# Altium PCB Temctrl.PcbDoc (part 2 of 2)
Units mm, origin at the board's own origin, x right, y up, seen from the top; angles counter-clockwise.
Board outline 209.42 x 71.25 mm, 2 copper layers (Top Layer, Bottom Layer); 243 components, 190 nets, 729 pads, 123 vias.
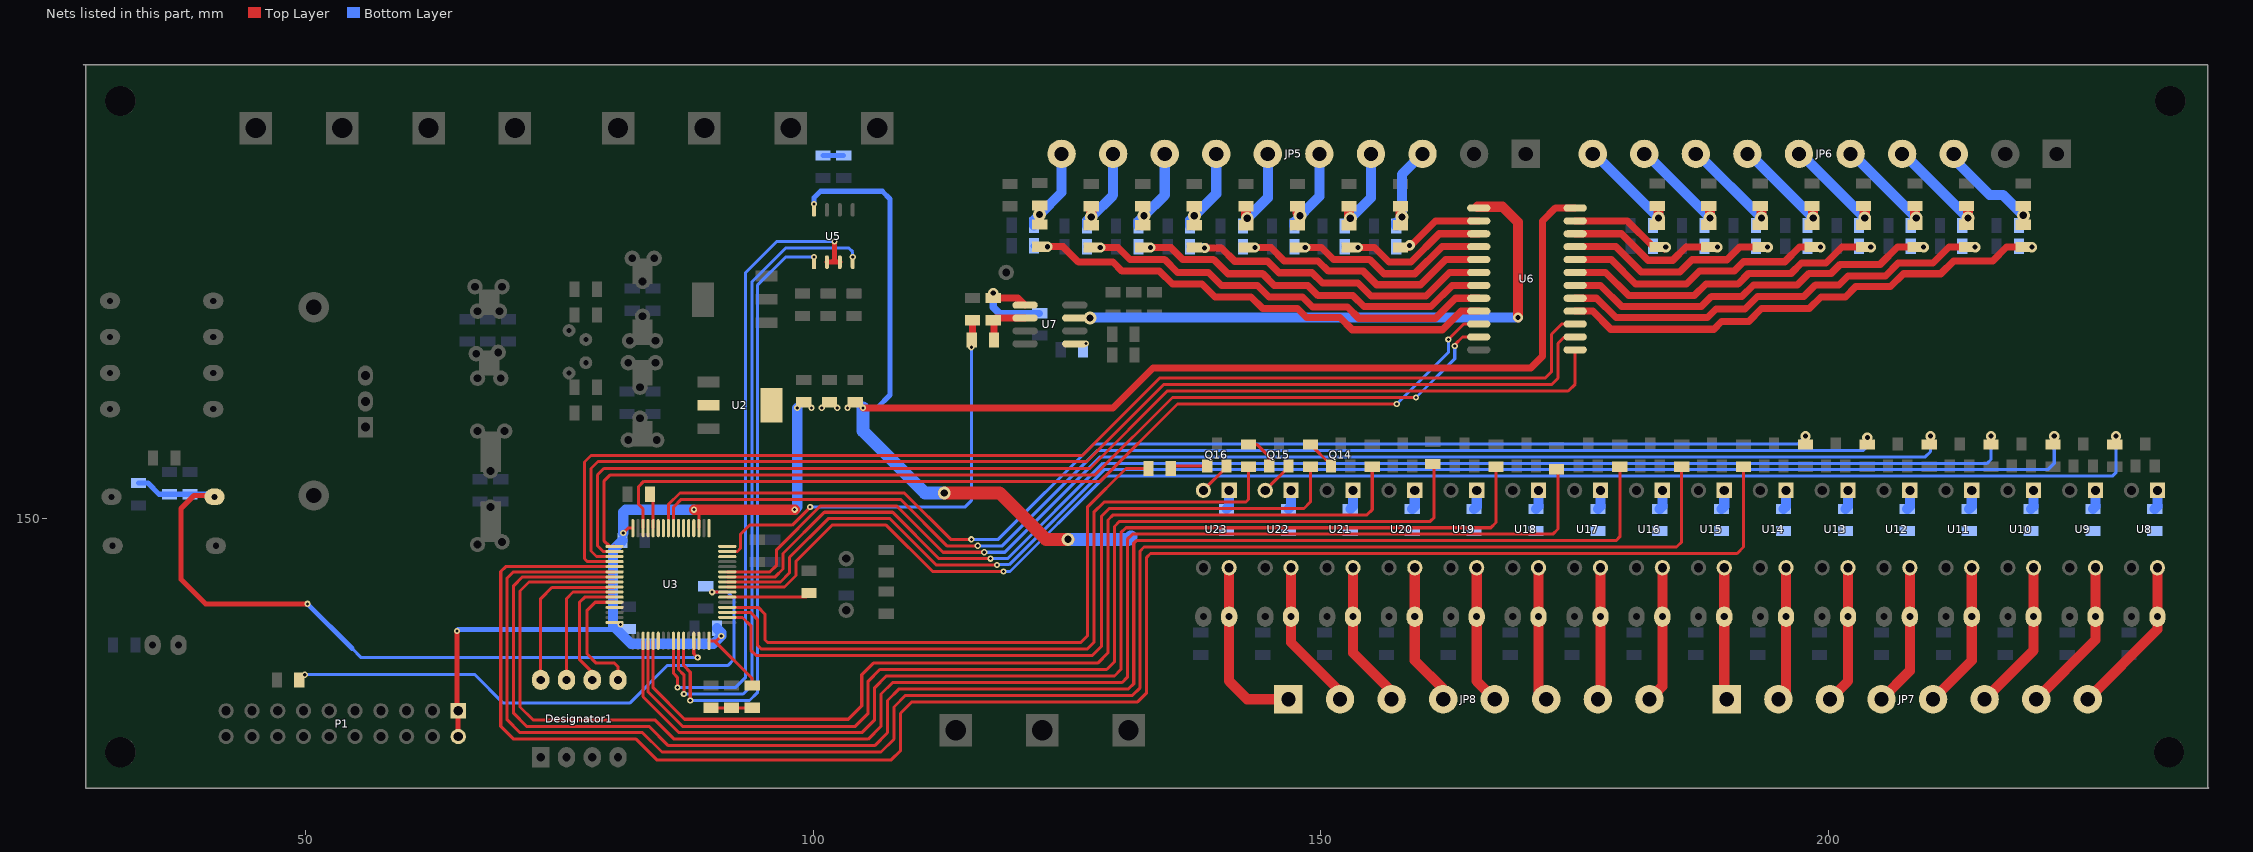
[diagram p2: the nets of this part, all layers, seen from the top]

## Via types
v1: diameter 0.61, hole 0.305, Top Layer to Bottom Layer, 72 vias
v2: diameter 1.27, hole 0.711, Top Layer to Bottom Layer, 20 vias
v3: diameter 1.016, hole 0.508, Top Layer to Bottom Layer, 17 vias
v4: diameter 1, hole 0.5, Top Layer to Bottom Layer, 7 vias
v5: diameter 1.25, hole 0.5, Top Layer to Bottom Layer, 6 vias
v6: diameter 0.7, hole 0.305, Top Layer to Bottom Layer, 1 vias

## Nets (pads, with @x,y where several pads share a name; then routed paths per layer and width w, separated by ;. In a path a pad name is that pad's centre, name@x,y a point inside that pad or via, vN(x,y) a via of type N, cw(c..) or ccw(c..) an arc to the next point about the centre after c; other vN are vias at no path point) (continued)
NetQ14_2: Q14.2 R100.2 | length 3
  Top Layer w0.3: R100.2@148.971,157.31 151.002,155.279 Q14.2@151.002,155.19
NetQ15_1: Q15.1 U22.2 | length 3.4
  Top Layer w0.3: U22.2@144.526,152.781 146.811,155.066 Q15.1@146.811,155.19
NetQ15_2: Q15.2 R101.2 | length 3.4
  Top Layer w0.3: R101.2@142.875,157.31 143.68,157.31 144.906,156.084 Q15.2@144.906,155.19
NetQ16_1: Q16.1 U23.2 | length 3.4
  Top Layer w0.3: U23.2@138.43,152.781 140.715,155.066 Q16.1@140.715,155.19
NetQ16_2: Q16.2 R102.2 | length 3.7
  Top Layer w0.3: R102.2@135.212,154.94 135.462,155.19 Q16.2@138.81,155.19
NetR6_2: R6.2 U3.6 | length 8.2
  Top Layer w0.3: U3.6@91.529,142.26 99.291,142.26 R6.2@99.568,142.537
NetR8_1: R8.1 R9.2 R10.2 | length 4.1
  Top Layer w0.3: R9.2@89.916,131.361 R10.2@91.948,131.361 R8.1@93.98,131.361
NetR13_1: R13.1 R14.1 | length 2
  Bottom Layer w0.5: R14.1@100.965,185.758 R13.1@102.997,185.758
NetR32_1: R32.1 U7.1
  other v1: 126.873,167.259
NetR44_1: R44.1 R46.1 U7.6 | length 5.1
  Top Layer w0.7: R44.1@117.813,167.597 117.813,169.629 117.94,169.756 U7.6@120.867,169.756
NetR45_2: R45.2 R46.2 U7.5 | length 9.7
  Top Layer w0.7: R46.2@117.729,171.745 120.148,171.745 U7.5@120.867,171.026
  Bottom Layer w0.7: v3(117.729,172.212) 117.729,170.815 118.323,170.221 R45.2@122.301,170.221
NetR59_2: R59.2 U8.1 | length 1.9
  Bottom Layer w1: R59.2@232.156,150.96 232.41,151.214 U8.1@232.41,152.781
NetR60_2: R60.2 U9.1 | length 1.9
  Bottom Layer w1: R60.2@226.06,150.96 226.314,151.214 U9.1@226.314,152.781
NetR61_2: R61.2 U10.1 | length 1.9
  Bottom Layer w1: R61.2@219.964,150.96 220.218,151.214 U10.1@220.218,152.781
NetR62_2: R62.2 U11.1 | length 1.9
  Bottom Layer w1: R62.2@213.868,150.96 214.122,151.214 U11.1@214.122,152.781
NetR71_2: R71.2 U12.1 | length 1.9
  Bottom Layer w1: R71.2@207.772,150.96 208.026,151.214 U12.1@208.026,152.781
NetR72_2: R72.2 U13.1 | length 1.9
  Bottom Layer w1: R72.2@201.676,150.96 201.93,151.214 U13.1@201.93,152.781
NetR73_2: R73.2 U14.1 | length 1.9
  Bottom Layer w1: R73.2@195.58,150.96 195.834,151.214 U14.1@195.834,152.781
NetR74_2: R74.2 U15.1 | length 1.9
  Bottom Layer w1: R74.2@189.484,150.96 189.738,151.214 U15.1@189.738,152.781
NetR83_2: R83.2 U16.1 | length 1.9
  Bottom Layer w1: R83.2@183.388,150.96 183.642,151.214 U16.1@183.642,152.781
NetR84_2: R84.2 U17.1 | length 1.9
  Bottom Layer w1: R84.2@177.292,150.96 177.546,151.214 U17.1@177.546,152.781
NetR85_2: R85.2 U18.1 | length 1.9
  Bottom Layer w1: R85.2@171.196,150.96 171.45,151.214 U18.1@171.45,152.781
NetR86_2: R86.2 U19.1 | length 1.9
  Bottom Layer w1: R86.2@165.1,150.96 165.354,151.214 U19.1@165.354,152.781
NetR95_2: R95.2 U20.1 | length 1.9
  Bottom Layer w1: R95.2@159.004,150.96 159.258,151.214 U20.1@159.258,152.781
NetR96_2: R96.2 U21.1 | length 1.9
  Bottom Layer w1: R96.2@152.908,150.96 153.162,151.214 U21.1@153.162,152.781
NetR97_2: R97.2 U22.1 | length 1.9
  Bottom Layer w1: R97.2@146.812,150.96 147.066,151.214 U22.1@147.066,152.781
NetR98_2: R98.2 U23.1 | length 1.9
  Bottom Layer w1: R98.2@140.716,150.96 140.97,151.214 U23.1@140.97,152.781
OUT0: D8.2 JP7.8 U8.4 | length 15.8
  Top Layer w1: JP7.8@225.552,132.207 232.41,139.065 D8.2@232.41,140.335 U8.4@232.41,145.161
OUT1: D9.2 JP7.7 U9.4 | length 15.4
  Top Layer w1: JP7.7@220.472,132.207 226.314,138.049 D9.2@226.314,140.335 U9.4@226.314,145.161
OUT2: D10.2 JP7.6 U10.4 | length 15
  Top Layer w1: JP7.6@215.392,132.207 220.218,137.033 D10.2@220.218,140.335 U10.4@220.218,145.161
OUT3: D11.2 JP7.5 U11.4 | length 14.5
  Top Layer w1: JP7.5@210.312,132.207 214.122,136.017 D11.2@214.122,140.335 U11.4@214.122,145.161
OUT4: D12.2 JP7.4 U12.4 | length 14.1
  Top Layer w1: JP7.4@205.232,132.207 208.026,135.001 D12.2@208.026,140.335 U12.4@208.026,145.161
OUT5: D13.2 JP7.3 U13.4 | length 13.7
  Top Layer w1: JP7.3@200.152,132.207 201.93,133.985 D13.2@201.93,140.335 U13.4@201.93,145.161
OUT6: D14.2 JP7.2 U14.4 | length 13.3
  Top Layer w1: JP7.2@195.072,132.207 195.834,132.969 D14.2@195.834,140.335 U14.4@195.834,145.161
OUT7: D15.2 JP7.1 U15.4 | length 13.1
  Top Layer w1: U15.4@189.738,145.161 D15.2@189.738,140.335 189.738,132.461 JP7.1@189.992,132.207
OUT8: D16.2 JP8.8 U16.4 | length 13.5
  Top Layer w1: JP8.8@182.372,132.207 183.642,133.477 D16.2@183.642,140.335 U16.4@183.642,145.161
OUT9: D17.2 JP8.7 U17.4 | length 13.1
  Top Layer w1: JP8.7@177.292,132.207 177.546,132.461 D17.2@177.546,140.335 U17.4@177.546,145.161
OUT10: D18.2 JP8.6 U18.4 | length 13.3
  Top Layer w1: U18.4@171.45,145.161 D18.2@171.45,140.335 171.45,132.969 JP8.6@172.212,132.207
OUT11: D19.2 JP8.5 U19.4 | length 13.7
  Top Layer w1: U19.4@165.354,145.161 D19.2@165.354,140.335 165.354,133.985 JP8.5@167.132,132.207
OUT12: D20.2 JP8.4 U20.4 | length 14.1
  Top Layer w1: U20.4@159.258,145.161 D20.2@159.258,140.335 159.258,136.017 162.052,133.223 JP8.4@162.052,132.207
OUT13: D21.2 JP8.3 U21.4 | length 14.5
  Top Layer w1: U21.4@153.162,145.161 D21.2@153.162,140.335 153.162,136.779 156.972,132.969 JP8.3@156.972,132.207
OUT14: D22.2 JP8.2 U22.4 | length 15
  Top Layer w1: U22.4@147.066,145.161 D22.2@147.066,140.335 147.066,137.795 151.892,132.969 JP8.2@151.892,132.207
OUT15: D23.2 JP8.1 U23.4 | length 17.8
  Top Layer w1: U23.4@140.97,145.161 D23.2@140.97,140.335 140.97,133.985 142.748,132.207 JP8.1@146.812,132.207
PA0: U3.14
PA1: C62.2 R44.2 U3.15 | length 47.1
  Top Layer w0.3: U3.15@91.529,146.76 92.531,146.76 92.837,147.066 92.837,148.463 93.726,149.352 97.917,149.352 v1(99.695,151.13)
  Top Layer w0.7: R44.2@115.613,167.597 115.697,167.681 C62.2@115.697,169.545
  Bottom Layer w0.3: v1(99.695,151.13) 114.935,151.13 115.57,151.765 115.57,155.702 115.57,162.814 ; 115.57,165.862 115.57,162.814 ; v1(115.57,166.878) 115.57,162.814
PA2: U3.16
PA3: U3.17
PA4: U3.20
PA5: U3.21
PA6: U3.22
PA7: U3.23
PA8: Designator1.8 U3.41 | length 19.6
  Top Layer w0.3: Designator1.8@73.152,134.112 73.152,139.573 ; 73.152,135.763 73.152,139.573 ; U3.41@80.429,143.26 80.381,143.212 74.251,143.212 73.152,142.113 73.152,139.573
PA9: Designator1.7 U3.42 | length 13.9
  Top Layer w0.3: Designator1.7@75.692,134.112 75.692,136.652 ; 75.692,135.763 75.692,136.652 ; U3.42@80.429,142.76 76.339,142.76 75.692,142.113 75.692,136.652
PA10: Designator1.6 U3.43 | length 11.8
  Top Layer w0.3: Designator1.6@78.232,134.112 78.232,134.874 76.962,136.144 76.962,141.732 77.49,142.26 U3.43@80.429,142.26
PA11: Designator1.5 U3.44 | length 12.2
  Top Layer w0.3: U3.44@80.429,141.76 78.514,141.76 77.724,140.97 77.724,136.652 78.613,135.763 80.423,135.763 80.772,135.414 Designator1.5@80.772,134.112
PA12: U3.45
PB0: U3.26
PB1: U3.27
PB2: R1.2 U3.28 | length 3.5
  Top Layer w0.3: R1.2@83.904,152.4 84.229,152.075 U3.28@84.229,149.06
PB5: U3.57 U5.2 U5.3 | length 65.2
  Top Layer w0.3: U3.57@86.229,137.96 86.229,134.751 86.614,134.366 v1(86.614,133.35)
  Top Layer w0.508: U5.2@101.346,175.26 101.854,175.26 ; v1(102.108,177.292) 102.108,175.514 101.854,175.26 ; U5.3@102.616,175.26 101.854,175.26
  Bottom Layer w0.3: v1(86.614,133.35) 92.329,133.35 93.345,134.366 93.345,174.244 96.393,177.292 v1(102.108,177.292)
PB8: C9.1 D5.2 R3.1 R5.1 U3.61 | length 74.8
  Top Layer w0.3: U3.61@88.229,137.96 88.229,136.688 v1(88.615,136.302)
  Top Layer w0.5: D5.2@41.021,152.146 40.894,152.273 38.989,152.273 37.719,151.003 37.719,144.018 40.132,141.605 v1(50.165,141.605)
  Bottom Layer w0.3: 54.555,137.215 55.468,136.302 v1(88.615,136.302)
  Bottom Layer w0.5: R3.1@33.528,153.5 34.46,153.5 35.56,152.4 C9.1@36.576,152.4 R5.1@38.608,152.4 40.767,152.4 D5.2@41.021,152.146 ; v1(50.165,141.605) 54.555,137.215
PB9: U3.62
PB10: U3.29
PB11: U3.30 U6.10 | length 94.4
  Top Layer w0.3: U3.30@83.229,149.06 83.229,150.959 82.804,151.384 82.804,153.162 83.312,153.67 128.27,153.67 135.89,161.29 v1(157.48,161.29) ; v1(162.56,167.64) 164.084,169.164 U6.10@165.557,169.164
  Bottom Layer w0.3: v1(157.48,161.29) 162.56,166.37 v1(162.56,167.64)
PB12: U3.33 U6.11 | length 100.1
  Top Layer w0.3: U3.33@80.369,147.32 U3.33@80.429,147.26 79.943,147.26 79.375,147.828 79.375,153.67 80.01,154.305 85.344,154.305 127.762,154.305 135.382,161.925 v1(159.385,161.925) ; v1(163.195,167.005) 163.195,167.132 163.957,167.894 U6.11@165.557,167.894
  Bottom Layer w0.3: v1(159.385,161.925) 163.195,165.735 v1(163.195,167.005)
PB13: U3.34 U6.13 | length 112.3
  Top Layer w0.3: U3.34@80.429,146.76 79.3,146.76 78.74,147.32 78.74,154.305 79.375,154.94 124.482,154.94 127.254,154.94 134.874,162.56 174.371,162.56 175.057,163.246 U6.13@175.057,166.624
PB14: U3.35 U6.14 | length 115
  Top Layer w0.3: U3.35@80.429,146.26 78.657,146.26 78.105,146.812 78.105,154.94 78.796,155.631 123.919,155.631 126.929,155.631 134.493,163.195 172.72,163.195 173.355,163.83 173.355,167.259 173.99,167.894 U6.14@175.057,167.894
PB15: U3.36 U6.15 | length 118
  Top Layer w0.3: U3.36@80.429,145.76 77.76,145.76 77.47,146.05 77.47,155.575 78.109,156.214 126.496,156.214 134.112,163.83 172.085,163.83 172.72,164.465 172.72,168.148 173.736,169.164 U6.15@175.057,169.164
PC0: R63.1 U3.8 | length 150.4
  Top Layer w0.3: U3.8@91.529,143.26 97.159,143.26 98.298,144.399 98.298,145.796 101.854,149.352 107.188,149.352 111.76,144.78 112.395,144.78 v1(118.745,144.78) ; R63.1@228.219,157.31 228.346,157.437 v4@228.346,157.861
  Bottom Layer w0.3: v1(118.745,144.78) 119.38,144.78 128.778,154.178 227.965,154.178 228.346,154.559 v4(228.346,158.115) v4@228.346,158.242
PC1: R64.1 U3.9 | length 142.9
  Top Layer w0.3: U3.9@91.529,143.76 96.77,143.76 97.663,144.653 97.663,146.177 101.473,149.987 107.569,149.987 112.141,145.415 v1(118.11,145.415)
  Bottom Layer w0.3: v1(118.11,145.415) 118.15,145.455 119.293,145.455 128.651,154.813 221.615,154.813 222.25,155.448 v4(222.25,158.115)
PC2: R65.1 U3.10 | length 137.1
  Top Layer w0.3: U3.10@91.529,144.26 96.254,144.26 97.028,145.034 97.028,146.558 101.092,150.622 107.823,150.622 112.395,146.05 v1(117.475,146.05) ; R65.1@216.027,157.31 v4(216.027,158.115)
  Bottom Layer w0.3: v1(117.475,146.05) 119.126,146.05 128.524,155.448 215.646,155.448 216.027,155.829 v4(216.027,158.115)
PC3: R66.1 U3.11 | length 131.8
  Top Layer w0.3: U3.11@91.529,144.76 95.738,144.76 96.393,145.415 96.393,146.939 100.711,151.257 108.204,151.257 112.776,146.685 v1(116.84,146.685) ; R66.1@209.931,157.31 210.058,157.437 v4(210.058,158.115)
  Bottom Layer w0.3: v1(116.84,146.685) 118.872,146.685 128.27,156.083 209.55,156.083 210.058,156.591 ; v4@210.058,157.861 210.058,156.591 ; v4(210.058,158.115) 210.058,156.591
PC4: R75.1 U3.24 | length 127.5
  Top Layer w0.3: U3.24@86.229,149.06 86.229,151.126 86.995,151.892 108.585,151.892 113.157,147.32 v1(116.205,147.32) ; R75.1@203.835,157.31 v4(203.835,157.988)
  Bottom Layer w0.3: v1(116.205,147.32) 118.618,147.32 128.016,156.718 203.454,156.718 203.835,157.099 v4(203.835,157.988)
PC5: R76.1 U3.25 | length 121.7
  Top Layer w0.3: U3.25@85.729,149.06 85.729,151.388 86.868,152.527 108.966,152.527 113.538,147.955 v1(115.57,147.955) ; R76.1@197.739,157.31 v4(197.739,158.115)
  Bottom Layer w0.3: v1(115.57,147.955) 118.237,147.955 127.635,157.353 196.977,157.353 v4(197.739,158.115)
PC6: R77.1 U3.37 | length 177.4
  Top Layer w0.3: 70.358,128.397 70.104,128.651 ; U3.37@80.429,145.26 69.695,145.26 69.215,144.78 69.215,129.54 70.104,128.651 ; R77.1@191.643,155.11 191.643,147.193 191.008,146.558 133.223,146.558 132.842,146.177 132.842,132.842 131.953,131.953 109.728,131.953 108.585,130.81 108.585,127.127 107.696,126.238 84.582,126.238 82.55,128.27 70.485,128.27 70.104,128.651
PC7: R78.1 U3.38 | length 167.5
  Top Layer w0.3: U3.38@80.429,144.76 70.465,144.76 69.85,144.145 69.85,130.175 71.12,128.905 83.185,128.905 85.09,127 106.68,127 107.95,128.27 107.95,131.445 109.093,132.588 131.445,132.588 132.207,133.35 132.207,146.812 132.588,147.193 185.039,147.193 185.547,147.701 R78.1@185.547,155.11
PC8: R87.1 U3.39 | length 158.6
  Top Layer w0.3: U3.39@80.429,144.26 71.362,144.26 70.485,143.383 70.485,130.81 71.755,129.54 83.82,129.54 85.725,127.635 106.045,127.635 107.315,128.905 107.315,132.08 108.458,133.223 131.064,133.223 131.572,133.731 131.572,147.574 131.826,147.828 179.07,147.828 179.451,148.209 R87.1@179.451,155.11
PC9: R88.1 U3.40 | length 149.6
  Top Layer w0.3: U3.40@80.429,143.76 72.005,143.76 71.12,142.875 71.12,131.445 72.39,130.175 84.399,130.175 86.304,128.27 105.41,128.27 106.68,129.54 106.68,132.715 107.823,133.858 130.429,133.858 130.937,134.366 130.937,147.955 131.445,148.463 172.847,148.463 173.355,148.971 173.355,152.527 ; R88.1@173.228,154.856 173.355,154.729 173.355,152.527 ; 173.355,153.162 173.355,152.527
PC10: R89.1 U3.51 | length 114.8
  Top Layer w0.3: U3.51@83.229,137.96 83.229,132.457 86.781,128.905 104.775,128.905 106.045,130.175 106.045,133.35 107.188,134.493 129.667,134.493 130.302,135.128 130.302,148.59 130.81,149.098 166.751,149.098 167.259,149.606 R89.1@167.259,155.11
PC11: R90.1 U3.52 | length 107.1
  Top Layer w0.3: U3.52@83.729,137.96 83.729,132.933 87.122,129.54 104.14,129.54 105.41,130.81 105.41,133.985 106.553,135.128 128.905,135.128 129.667,135.89 129.667,149.225 130.175,149.733 160.782,149.733 161.163,150.114 R90.1@161.163,155.11
PC12: R99.1 U3.53 | length 99
  Top Layer w0.3: U3.53@84.229,137.96 84.229,133.322 87.32,130.231 103.449,130.231 104.775,131.556 104.775,134.62 105.918,135.763 128.016,135.763 129.032,136.779 129.032,149.86 129.54,150.368 154.559,150.368 155.067,150.876 R99.1@155.067,155.11
PC13: R100.1 U3.2 | length 77.6
  Top Layer w0.3: U3.2@91.529,140.26 93.039,140.26 93.853,139.446 93.853,137.033 94.361,136.525 127.508,136.525 128.397,137.414 128.397,150.241 129.159,151.003 148.336,151.003 148.971,151.638 R100.1@148.971,155.11
PC14: R101.1 U3.3 | length 71.2
  Top Layer w0.3: U3.3@91.529,140.76 93.809,140.76 94.488,140.081 94.488,137.541 94.869,137.16 127,137.16 127.635,137.795 127.635,150.622 128.651,151.638 142.621,151.638 142.875,151.892 R101.1@142.875,155.11
PC15: R102.1 U3.4 | length 58.9
  Top Layer w0.3: U3.4@91.529,141.26 94.579,141.26 95.25,140.589 95.25,138.049 95.504,137.795 126.365,137.795 127,138.43 127,151.13 130.81,154.94 R102.1@133.012,154.94
PD2: U3.54
RES#: C23.1 R11.2 U3.7 | length 55.9
  Top Layer w0.3: R11.2@49.36,134.112 49.868,134.62 v1(49.911,134.62) ; v1(90.043,142.748) 91.517,142.748 U3.7@91.529,142.76
  Bottom Layer w0.3: v1(49.911,134.62) 66.675,134.62 69.474,131.821 81.91,131.821 85.598,135.509 91.567,135.509 92.202,136.144 92.202,142.113 91.567,142.748 v1(90.043,142.748)
RX1: U3.59 U5.1 | length 60.5
  Top Layer w0.3: U3.59@87.229,137.96 87.229,136.398 87.229,135.529 87.884,134.874 v1(87.884,132.08) ; U5.1@100.076,175.26 v1(100.076,175.768)
  Bottom Layer w0.3: v1(87.884,132.08) 93.726,132.08 94.488,132.842 94.488,172.974 97.282,175.768 v1(100.076,175.768)
TIN0: C36.1 JP5.10 R16.1 R20.1 | length 10.1
  Top Layer w0.3: v2(122.301,179.959) R16.1@122.301,180.848
  Bottom Layer w1: C36.1@121.75,178.9 121.75,179.408 v2(122.301,179.959) ; 123.063,180.721 v2(122.301,179.959) ; JP5.10@124.46,185.928 124.46,182.118 v2(122.301,179.959)
TIN1: C38.1 JP5.9 R17.1 R21.1 | length 10.3
  Top Layer w1: v2(127.381,179.705) R17.1@127.381,180.764
  Bottom Layer w1: C38.1@126.957,178.816 126.957,179.281 v2(127.381,179.705) ; 128.143,180.467 v2(127.381,179.705) ; JP5.9@129.54,185.928 129.54,181.864 v2(127.381,179.705)
TIN2: C40.1 JP5.8 R18.1 R22.1 | length 10.1
  Top Layer w1: R18.1@132.461,180.764 132.588,180.637 v2(132.588,179.832)
  Bottom Layer w1: C40.1@132.037,178.816 132.037,179.281 v2(132.588,179.832) ; 133.223,180.467 v2(132.588,179.832) ; JP5.8@134.62,185.928 134.62,181.864 v2(132.588,179.832)
TIN3: C42.1 JP5.7 R19.1 R23.1 | length 9.6
  Top Layer w1: v2(137.541,179.832) R19.1@137.541,180.764
  Bottom Layer w1: C42.1@137.117,178.816 C42.1@137.117,179.408 ; 138.303,180.594 v2(137.541,179.832) 139.7,181.991 JP5.7@139.7,185.928
TIN4: C44.1 JP5.6 R24.1 R28.1 | length 9.3
  Top Layer w1: R24.1@142.621,180.764 142.621,179.705 v2(142.748,179.578)
  Bottom Layer w1: 143.383,180.213 v2(142.748,179.578) 144.78,181.61 JP5.6@144.78,185.928
TIN5: C46.1 JP5.5 R25.1 R29.1 | length 9.1
  Top Layer w1: R25.1@147.701,180.764 147.701,180.086 v2(147.955,179.832)
  Bottom Layer w1: C46.1@147.404,178.816 C46.1@147.404,179.281 ; 148.463,180.34 v2(147.955,179.832) 149.86,181.737 JP5.5@149.86,185.928
TIN6: C48.1 JP5.4 R26.1 R30.1 | length 9.3
  Top Layer w1: R26.1@152.781,180.764 152.781,179.705 v2(152.908,179.578)
  Bottom Layer w1: 153.543,180.213 v2(152.908,179.578) 154.94,181.61 JP5.4@154.94,185.928
TIN7: C50.1 JP5.3 R27.1 R31.1 | length 9.6
  Top Layer w1: R27.1@157.861,180.764 157.861,179.832 v2(157.988,179.705)
  Bottom Layer w1: C50.1@157.437,179.154 C50.1@157.437,178.816 157.988,179.367 v2(157.988,179.705) 157.988,183.896 JP5.3@160.02,185.928
TIN8: C52.1 JP6.10 R33.1 R38.1 | length 10.3
  Top Layer w1: R33.1@183.134,180.807 183.261,180.68 v2(183.261,179.621)
  Bottom Layer w1: JP6.10@176.784,185.928 176.954,185.928 v2(183.261,179.621)
TIN9: C54.1 JP6.9 R34.1 R39.1 | length 10.3
  Top Layer w1: R34.1@188.214,180.807 188.341,180.68 v2(188.341,179.621)
  Bottom Layer w1: JP6.9@181.864,185.928 182.034,185.928 v2(188.341,179.621)
TIN10: C56.1 JP6.8 R35.1 R40.1 | length 10.3
  Top Layer w1: R35.1@193.294,180.807 193.421,180.68 v2(193.421,179.621)
  Bottom Layer w1: JP6.8@186.944,185.928 187.114,185.928 v2(193.421,179.621)
TIN11: C58.1 JP6.7 R36.1 R41.1 | length 10.3
  Top Layer w1: R36.1@198.374,180.807 198.501,180.68 v2(198.501,179.621)
  Bottom Layer w1: JP6.7@192.024,185.928 192.194,185.928 v2(198.501,179.621)
TIN12: C63.1 JP6.6 R47.1 R51.1 | length 10.3
  Top Layer w1: R47.1@203.454,180.807 203.581,180.68 v2(203.581,179.621)
  Bottom Layer w1: JP6.6@197.104,185.928 197.274,185.928 v2(203.581,179.621)
TIN13: C65.1 JP6.5 R48.1 R52.1 | length 10.3
  Top Layer w1: R48.1@208.534,180.807 208.534,179.748 v2(208.661,179.621)
  Bottom Layer w1: JP6.5@202.184,185.928 202.354,185.928 v2(208.661,179.621)
TIN14: C67.1 JP6.4 R49.1 R53.1 | length 10.3
  Top Layer w1: R49.1@213.614,180.807 213.741,180.68 v2(213.741,179.621)
  Bottom Layer w1: JP6.4@207.264,185.928 207.434,185.928 v2(213.741,179.621)
TIN15: C69.1 JP6.3 R50.1 R54.1 | length 11.5
  Top Layer w0.5: R54.1@219.202,178.943 v2(219.202,179.875) R50.1@219.202,180.807
  Bottom Layer w1: JP6.3@212.344,185.928 212.344,185.42 215.878,181.886 217.192,181.886 v2(219.202,179.875)
TX1: U3.58 U5.4 | length 65.4
  Top Layer w0.3: 86.729,135.521 86.729,136.144 ; U3.58@86.729,137.96 86.729,136.144 ; v1(87.249,132.715) 87.249,134.62 86.729,135.14 86.729,136.144 ; U5.4@103.886,175.26 v1(103.886,175.768)
  Bottom Layer w0.3: v1(87.249,132.715) 93.091,132.715 93.98,133.604 93.98,173.355 97.282,176.657 103.505,176.657 103.886,176.276 v1(103.886,175.768)
VCC: C14.1 C15.1 C16.1 C17.1 C18.1 C19.1 P1.1 P1.2 R8.2 R59.1 R60.1 R61.1 R62.1 R71.1 R72.1 R73.1 R74.1 R83.1 R84.1 R85.1 R86.1 R95.1 R96.1 R97.1 R98.1 U2.3 U3.19 U3.32 U3.48 U3.64 U5.8 U6.24 | length 238
  Top Layer w0.3: v1(81.28,148.59) 81.75,149.06 U3.32@82.229,149.06 ; v1@88.392,150.749 88.729,150.412 U3.19@88.729,149.06 ; U3.64@89.729,137.96 90.259,137.96 ; v1(90.932,138.43) 90.462,137.96 90.259,137.96 ; R8.2@93.98,133.561 93.98,134.239 90.259,137.96
  Top Layer w0.5: P1.2@64.897,128.651 P1.2@65.024,128.524 P1.1@65.024,131.064 64.897,131.191 v1(64.897,138.938)
  Top Layer w0.7: v1(104.902,160.909) 129.54,160.909 133.477,164.846 170.688,164.846 171.831,165.989 171.831,179.324 173.101,180.594 U6.24@175.057,180.594
  Top Layer w1: v1(88.265,150.876) v1(98.171,150.876)
  Top Layer w1.27: v2(112.903,152.527) 118.364,152.527 122.936,147.955 v2(125.095,147.955)
  Bottom Layer w0.5: v1(64.897,138.938) 65.024,139.065 80.645,139.065 ; v1(100.076,180.975) 100.076,181.61 100.711,182.245 106.807,182.245 107.569,181.483 107.569,162.179 106.299,160.909 v1(104.902,160.909)
  Bottom Layer w1: C18.1@81.196,147.828 80.264,146.896 80.264,139.446 80.645,139.065 82.042,137.668 90.17,137.668 v1(90.932,138.43) 90.932,138.768 C19.1@90.508,139.192 ; v1(81.28,148.59) 81.28,150.622 81.534,150.876 v1(88.265,150.876) ; v1@98.168,150.957 98.168,150.879 v1(98.171,150.876) 98.425,151.13 v1(98.425,160.909)
  Bottom Layer w1.27: v1(104.902,160.909) 104.902,158.623 110.998,152.527 v2(112.903,152.527) ; v2(125.095,147.955) 131.064,147.955 131.318,148.209
  other v1: 81.026,139.573 99.822,160.909 100.838,160.909 102.362,160.909 103.378,160.909
X: U6.1 U7.3 | length 57.8
  Top Layer w0.3: U7.3@125.767,169.756 v2(127.254,169.756)
  Top Layer w1: U6.1@165.43,180.721 167.894,180.721 169.418,179.197 v4(169.418,169.799)
  Bottom Layer w1: v2@127.338,169.672 v2(127.254,169.756) 127.297,169.799 v4(169.418,169.799)
X0: C37.2 R20.2 U6.9 | length 48
  Top Layer w0.7: v3(123.063,176.784) 124.587,176.784 126.111,175.26 129.54,175.26 130.429,174.371 134.112,174.371 135.382,173.101 138.303,173.101 139.573,171.831 143.129,171.831 144.272,170.688 147.701,170.688 148.59,169.799 151.892,169.799 153.089,168.602 161.998,168.602 163.83,170.434 U6.9@165.557,170.434
  Bottom Layer w0.7: C37.2@121.75,176.868 122.979,176.868 v3(123.063,176.784)
X1: C39.2 R21.2 U6.8 | length 43.2
  Top Layer w0.5: R21.2@127.381,176.7 v3(128.27,176.7)
  Top Layer w0.7: v3(128.27,176.7) 130.005,176.7 131.191,175.514 134.62,175.514 135.89,174.244 138.938,174.244 140.208,172.974 143.764,172.974 144.907,171.831 148.209,171.831 149.188,170.852 152.617,170.852 153.733,169.736 161.291,169.736 163.26,171.704 U6.8@165.557,171.704
  Bottom Layer w0.7: C39.2@126.957,176.784 127.041,176.7 v3(128.27,176.7)
X2: C41.2 R22.2 U6.7 | length 36.8
  Top Layer w0.7: v3(133.223,176.7) 135.212,176.7 136.398,175.514 139.446,175.514 140.843,174.117 144.272,174.117 145.415,172.974 148.717,172.974 149.733,171.958 153.162,171.958 154.242,170.879 160.845,170.879 162.941,172.974 U6.7@165.557,172.974
  Bottom Layer w0.7: C41.2@132.037,176.784 132.121,176.7 v3(133.223,176.7)
X3: C43.2 R23.2 U6.6 | length 31.6
  Top Layer w0.7: v3@138.684,176.784 v3(138.557,176.657) 140.208,176.657 141.515,175.35 144.763,175.35 145.896,174.217 147.066,174.217 149.139,174.217 150.165,173.191 153.67,173.191 154.94,171.921 160.364,171.921 162.687,174.244 U6.6@165.557,174.244
  Bottom Layer w0.7: C43.2@137.117,176.784 138.43,176.784 v3(138.557,176.657)
X4: C45.2 R28.2 U6.5 | length 26.7
  Top Layer w0.7: R28.2@142.621,176.7 v3(143.51,176.7) 145.077,176.7 146.39,175.387 149.733,175.387 150.749,174.371 154.178,174.371 155.511,173.037 159.829,173.037 162.306,175.514 U6.5@165.557,175.514
  Bottom Layer w0.7: C45.2@142.324,176.784 143.426,176.784 v3(143.51,176.7)
X5: C47.2 R29.2 U6.4 | length 20.4
  Top Layer w0.7: v3(148.463,176.7) 150.071,176.7 151.257,175.514 154.813,175.514 156.21,174.117 157.226,174.117 159.258,174.117 161.925,176.784 U6.4@165.557,176.784
  Bottom Layer w0.7: C47.2@147.404,176.784 147.488,176.7 v3(148.463,176.7)
X6: C49.2 R30.2 U6.3 | length 15.9
  Top Layer w0.7: R30.2@152.781,176.7 v3(153.67,176.7) 155.278,176.7 156.718,175.26 158.877,175.26 161.671,178.054 U6.3@165.557,178.054
  Bottom Layer w0.7: C49.2@152.357,176.784 152.441,176.7 v3(153.67,176.7)
X7: C51.2 R31.2 U6.2 | length 10.3
  Top Layer w0.7: R31.2@157.861,176.7 158.666,176.7 v3@158.877,176.911 ; v3(158.75,176.911) v3@158.877,176.911 ; U6.2@165.557,179.324 161.29,179.324 v3@158.877,176.911
  Bottom Layer w0.7: C51.2@157.437,176.784 158.623,176.784 v3(158.75,176.911)
X8: C53.2 R38.2 U6.23 | length 15.8
  Top Layer w0.7: 178.118,179.324 U6.23@175.057,179.324 180.193,179.324 182.774,176.743 R38.2@183.134,176.743 v3(183.98,176.743) ; R38.2@183.81,176.573 v3(183.98,176.743) ; v3@184.023,176.7 v3(183.98,176.743)
  Bottom Layer w0.5: C53.2@182.71,176.827 v3@183.896,176.827
  Bottom Layer w0.7: C53.2@182.71,176.827 182.794,176.743 v3(183.98,176.743)
X9: C55.2 R39.2 U6.22 | length 19.5
  Top Layer w0.5: U6.22@175.006,178.054 U6.22@175.057,178.054
  Top Layer w0.7: 177.546,178.054 U6.22@175.057,178.054 179.621,178.054 182.228,175.447 184.675,175.447 185.971,176.743 R39.2@188.214,176.743 v3(189.06,176.743)
  Bottom Layer w0.7: C55.2@187.79,176.827 188.976,176.827 v3(189.06,176.743)
X10: C57.2 R40.2 U6.21 | length 22.2
  Top Layer w0.7: U6.21@175.057,176.784 179.07,176.784 181.567,174.287 185.356,174.287 186.563,175.493 190.013,175.493 191.262,176.743 R40.2@193.294,176.743 v3(194.013,176.743)
  Bottom Layer w0.7: C57.2@192.87,176.827 192.954,176.743 v3(194.013,176.743)
X11: C59.2 R41.2 U6.20 | length 28
  Top Layer w0.7: U6.20@175.057,175.514 178.605,175.514 180.997,173.123 186.034,173.123 187.303,174.392 190.733,174.392 191.643,175.303 195.707,175.303 197.147,176.743 R41.2@198.374,176.743 v3(199.22,176.743)
  Bottom Layer w0.7: C59.2@197.95,176.827 198.034,176.743 v3(199.22,176.743)
X12: C64.2 R51.2 U6.19 | length 33.2
  Top Layer w0.7: U6.19@175.057,174.244 178.054,174.244 180.303,171.995 186.811,171.995 187.938,173.122 188.595,173.122 191.114,173.122 192.151,174.16 196.342,174.16 197.358,175.176 199.771,175.176 201.338,176.743 R51.2@203.454,176.743 v3(204.173,176.743)
  Bottom Layer w0.7: C64.2@203.03,176.827 203.114,176.743 v3(204.173,176.743)
X13: C66.2 R52.2 U6.18 | length 39.1
  Top Layer w0.5: U6.18@175.057,172.974 U6.18@175.174,172.857
  Top Layer w0.7: U6.18@175.057,172.974 177.546,172.974 179.641,170.879 187.473,170.879 188.468,171.874 191.473,171.874 192.616,173.017 196.934,173.017 198.077,174.16 200.279,174.16 201.168,175.049 205.105,175.049 206.799,176.743 R52.2@208.534,176.743 v3(209.38,176.743)
  Bottom Layer w0.7: C66.2@208.11,176.827 208.194,176.743 v3(209.38,176.743)
X14: C68.2 R53.2 U6.17 | length 44.4
  Top Layer w0.7: U6.17@175.057,171.704 177.165,171.704 179.07,169.799 188.087,169.799 188.931,170.643 191.788,170.643 193.018,171.874 197.569,171.874 198.712,173.017 201.041,173.017 201.93,173.906 205.613,173.906 206.883,175.176 210.312,175.176 211.879,176.743 R53.2@213.614,176.743 v3(214.46,176.743)
  Bottom Layer w0.7: C68.2@213.19,176.827 213.274,176.743 v3(214.46,176.743)
X15: C70.2 R54.2 U6.16 | length 50.4
  Top Layer w0.7: U6.16@175.057,170.434 176.784,170.434 178.562,168.656 188.722,168.656 189.484,169.418 192.151,169.418 193.421,170.688 198.12,170.688 199.263,171.831 201.676,171.831 202.692,172.847 206.121,172.847 207.391,174.117 211.074,174.117 212.344,175.387 216.195,175.387 217.551,176.743 R54.2@219.202,176.743 v3(220.048,176.743)
  Bottom Layer w0.5: C70.2@218.778,176.827 C70.2@218.862,176.743
  Bottom Layer w0.7: C70.2@218.862,176.743 v3(220.048,176.743)
pads on no net: P1.11 P1.17 P1.19 U1.0 U3.1

## Keep-outs
Keep-Out Layer:
  lines w0.254: 28.321,123.444 28.321,194.691 237.49,194.691 237.49,123.444 28.321,123.444

## Other copper
Top Layer:
  rectangle net AGND: 138.43,159.258 231.775,160.655
  rectangle net AVCC: 118.745,182.245 220.726,183.896
  region net AGND: 81.788,147.701 81.788,139.319 90.17,139.319 90.17,141.986 88.265,141.986 88.265,144.78 89.535,144.78 89.535,147.828 89.408,147.701
  region net NetC2_1: 40.005,148.844 40.005,145.669 71.12,145.669 71.12,152.273 57.912,152.273 57.912,160.02 54.229,160.02 54.229,148.844
  region net +5V: 54.229,162.941 57.912,162.941 57.912,168.91 71.12,168.91 71.12,174.498 54.229,174.498
  region net AGND: 39.751,165.227 39.751,156.21 53.594,156.21 53.594,160.528 58.801,160.528 58.801,153.035 71.12,153.035 71.12,168.021 58.801,168.021 58.801,162.56 53.594,162.56 53.594,165.227
  region net VCC: 88.265,161.925 88.265,160.274 93.345,160.274 93.345,157.099 105.41,157.099 105.41,161.925 97.155,161.925 97.155,163.195 93.345,163.195 93.345,161.925
  region net NetC10_1: 78.105,163.83 78.105,157.099 92.71,157.099 92.71,159.639 87.63,159.639 87.63,161.29 79.375,161.29 79.375,163.83
  region net AVCC: 87.63,173.355 87.63,169.545 92.075,169.545 92.075,171.069 105.41,171.069 105.41,172.72 92.075,172.72 92.075,173.355
  region net NetC24_1: 78.105,175.895 78.105,168.91 80.01,168.91 80.01,172.085 86.36,172.085 86.36,173.99 92.71,173.99 92.71,173.355 96.52,173.355 96.52,175.895
  region net +5V: 64.135,174.498 64.135,168.91 72.39,168.91 72.39,158.75 77.47,158.75 77.47,161.29 74.93,161.29 74.803,161.417 74.803,171.704 77.47,171.704 77.47,174.498
  region net AGND: 75.565,166.116 75.565,161.925 77.47,161.925 77.47,164.465 80.01,164.465 80.01,161.925 87.63,161.925 87.63,162.56 92.71,162.56 92.71,163.83 97.79,163.83 97.79,162.56 105.41,162.56 105.41,166.116
  region net AGND: 80.645,171.45 80.645,168.529 77.47,168.529 77.47,171.069 75.565,171.069 75.565,166.751 105.41,166.751 105.41,170.434 92.71,170.434 92.71,168.91 86.36,168.91 86.36,171.45
  region net +VIN: 29.591,172.72 29.591,166.624 32.385,166.624 32.385,148.717 29.845,148.717 29.845,145.923 35.56,145.923 35.56,172.72
Bottom Layer:
  rectangle net B: 78.74,186.69 91.567,190.5
  rectangle net A: 95.885,186.69 107.95,190.5
  rectangle net VCC: 98.044,160.274 105.41,161.925
  rectangle net AGND: 216.027,174.795 217.297,179.664
  rectangle net AGND: 210.439,174.795 211.709,179.664
  rectangle net AGND: 205.359,174.795 206.629,179.664
  rectangle net AGND: 200.279,174.795 201.549,179.664
  rectangle net AGND: 195.199,174.795 196.469,179.664
  rectangle net AGND: 190.119,174.795 191.389,179.664
  rectangle net AGND: 185.039,174.795 186.309,179.664
  rectangle net AGND: 179.959,174.795 181.229,179.664
  rectangle net AGND: 154.686,175.049 155.956,179.621
  rectangle net AGND: 149.606,175.049 150.876,179.621
  rectangle net AGND: 144.653,175.049 145.923,179.621
  rectangle net AGND: 139.573,175.049 140.843,179.621
  rectangle net AGND: 134.366,175.049 135.636,179.621
  rectangle net AGND: 129.286,175.049 130.556,179.621
  rectangle net AGND: 124.206,175.049 125.476,179.621
  rectangle net AGND: 118.999,175.133 120.269,181.229
  rectangle net VCC: 126.111,146.939 233.045,149.86
  rectangle net N: 173.99,143.637 175.895,146.304
  rectangle net N: 228.854,143.637 230.759,146.304
  rectangle net N: 222.758,143.637 224.663,146.304
  rectangle net N: 216.662,143.637 218.567,146.304
  rectangle net N: 210.566,143.637 212.471,146.304
  rectangle net N: 204.47,143.637 206.375,146.304
  rectangle net N: 198.374,143.637 200.279,146.304
  rectangle net N: 192.278,143.637 194.183,146.304
  rectangle net N: 186.182,143.637 188.087,146.304
  rectangle net N: 180.086,143.637 181.991,146.304
  rectangle net N: 167.894,143.637 169.799,146.304
  rectangle net N: 161.798,143.637 163.703,146.304
  rectangle net N: 155.702,143.637 157.607,146.304
  rectangle net N: 149.606,143.637 151.511,146.304
  rectangle net N: 137.414,143.637 139.319,146.304
  rectangle net N: 143.51,143.637 145.415,146.304
  rectangle net L1: 137.16,134.62 231.14,137.414
  region net AGND: 89.535,147.701 89.535,144.78 88.265,144.78 88.265,141.986 90.17,141.986 90.17,140.208 89.408,140.208 89.408,139.319 85.598,139.319 85.598,140.335 81.026,140.335 81.026,146.431 82.55,146.431 82.55,147.701
  region net AGND: 70.993,168.021 77.47,168.021 77.47,164.465 70.993,164.465
  region net AGND: 225.806,187.706 215.646,187.706 215.646,184.023 221.234,184.023 221.234,175.006 174.625,175.006 174.625,183.896 174.625,188.341 162.179,188.341 162.179,175.387 118.999,175.387 118.999,171.069 225.806,171.069
  region net N: 111.76,127 111.76,143.764 233.045,143.764 233.045,141.986 116.205,141.986 116.205,127
  region net L1: 120.65,127 141.605,127 141.605,137.414 120.65,137.414
  region net AC1: 42.545,170.053 42.545,186.055 55.88,186.055 55.88,191.135 36.83,191.135 36.83,186.69 32.385,186.69 32.385,165.735 29.591,165.735 29.591,162.942 35.555,162.94 35.56,170.053
  region net NetC2_1: 40.005,148.844 40.005,145.669 57.912,145.669 57.912,160.02 54.229,160.02 54.229,148.844
  region net NetC2_1: 71.12,152.273 71.12,145.669 56.261,145.669 56.261,152.273
  region net +5V: 57.912,162.941 54.229,162.941 54.229,174.498 71.12,174.498 71.12,168.91 57.912,168.91
  region net AGND: 39.751,156.21 53.594,156.21 53.594,160.528 58.801,160.528 58.801,153.035 71.12,153.035 71.12,168.021 58.801,168.021 58.801,162.56 53.594,162.56 53.594,165.227 39.751,165.227
  region net AC2: 59.69,191.135 59.69,184.15 43.307,184.15 43.307,169.291 36.195,169.291 36.195,162.179 29.591,162.179 29.591,159.385 39.116,159.385 39.116,165.989 48.26,165.989 48.26,179.07 73.025,179.07 73.025,191.135

## Text inside footprints (layer, text, board x,y; h text height)
P1: Top Overlay "20" at 40.64,129.032 h1.27 r180; Top Overlay "19" at 40.64,131.572 h1.27 r180; Top Overlay "1" at 67.564,131.572 h1.27 r180; Top Overlay "2" at 67.564,129.032 h1.27 r180